# EAGLE board uvmeter (EAGLE 7.3.0)
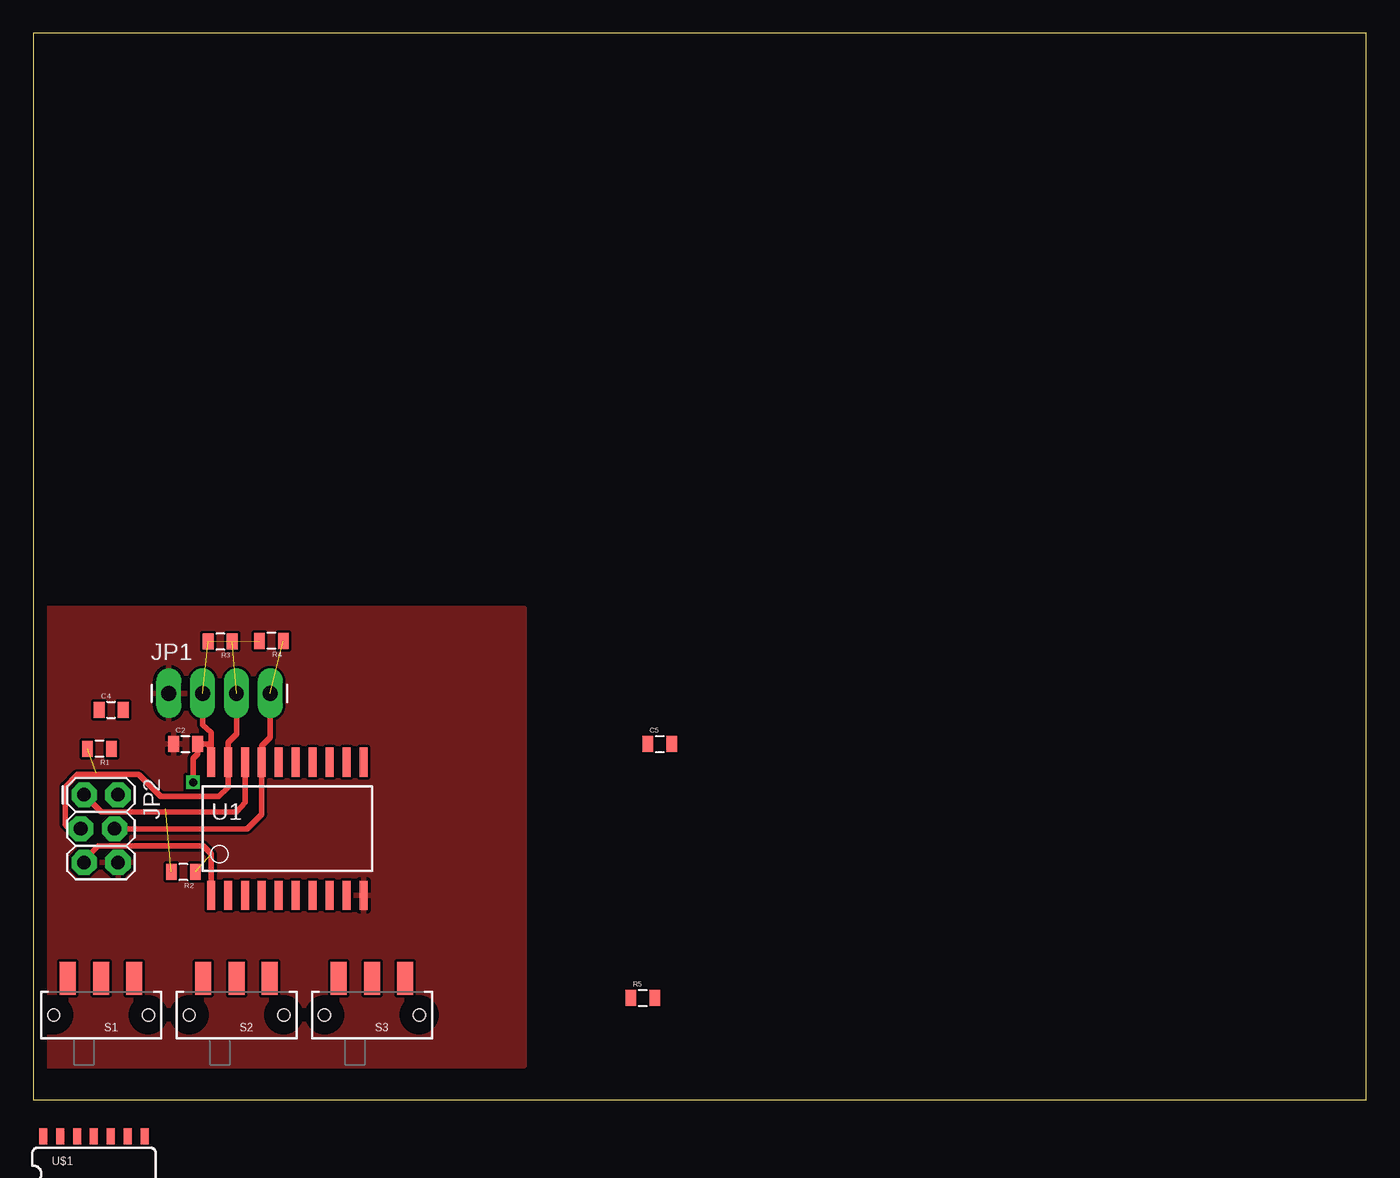
[diagram p0: board, top side]
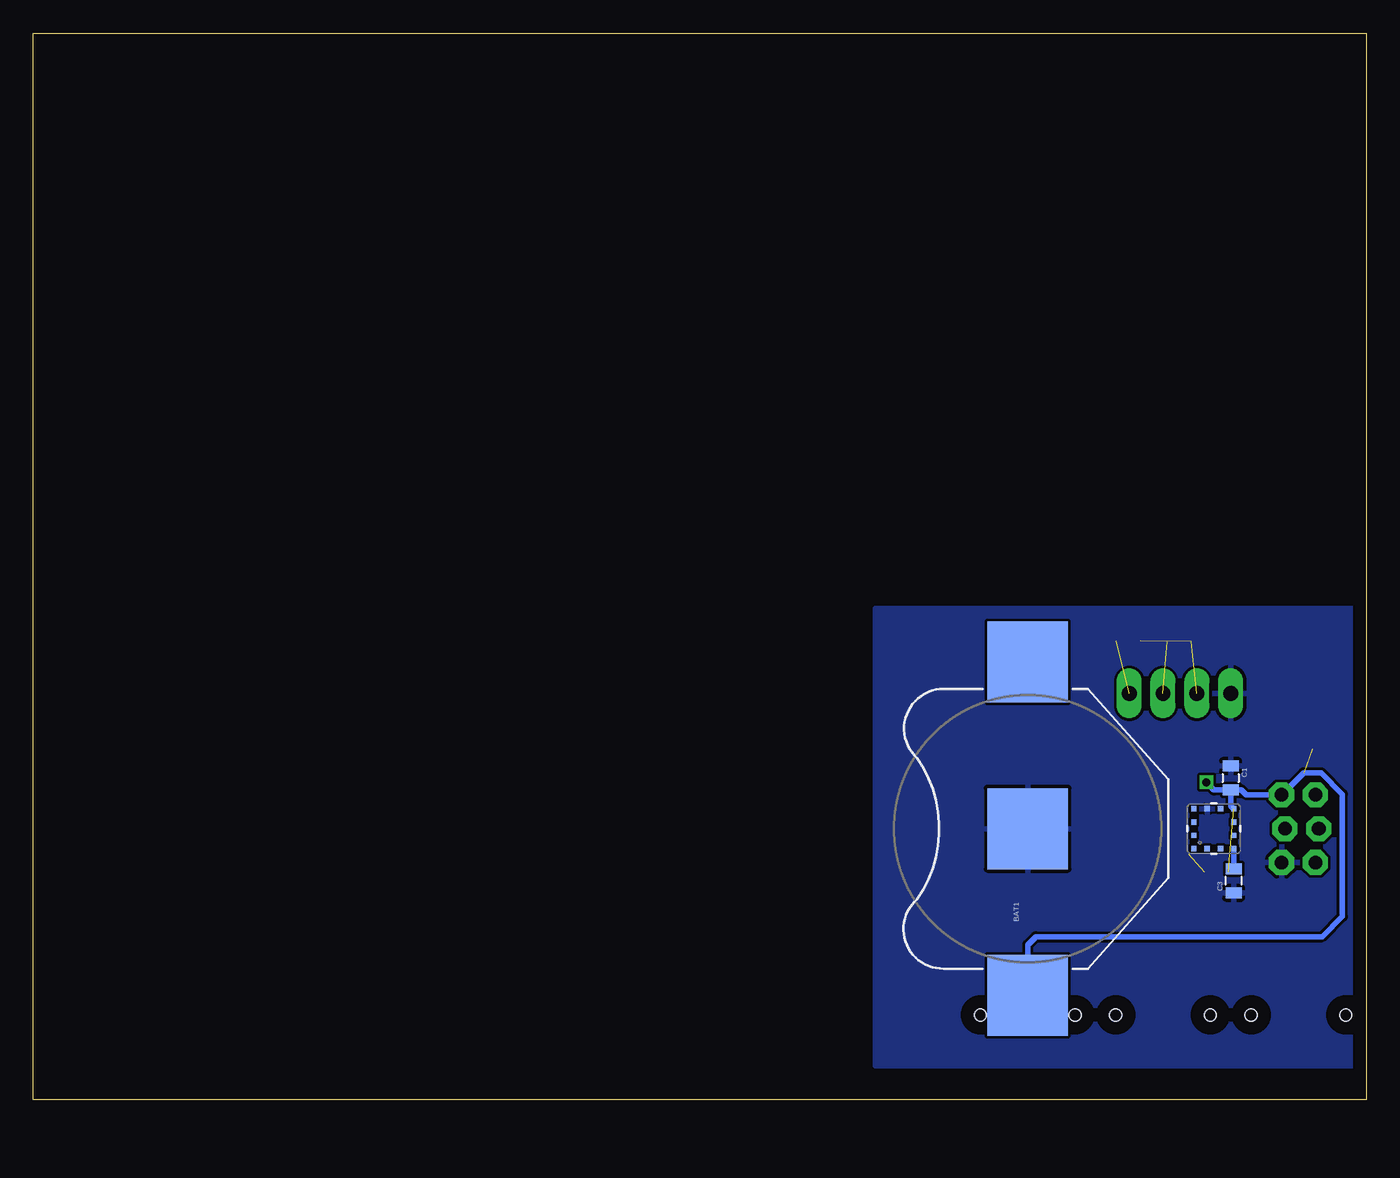
[diagram p1: board, bottom side, seen from below]

Size 100 x 80 mm. Coordinates in mm from the lower left corner, seen from the top.
Outline: 0,0 100,0 100,80 0,80 0,0
Copper layers (1*16): Top 0.035mm / dielectric 1.5mm / Bottom 0.035mm
Design rules "default": minimum track width 10mil, minimum drill 24mil, track to track 8mil, track to pad 8mil, pad to pad 8mil, via to via 8mil, smd to smd 8mil, copper to edge 40mil, drill to drill 8mil, minimum pad ring 10mil, minimum via ring 8mil, stop-mask expansion 4mil, vias tented up to drill 0mil, thermal gap 10mil

## Footprints (pad centres in the part's own frame; a part is rotated, then mirrored left to right if it is on the bottom)
BATTCON_20MM = smd 6.07 x 6.07: 1 -12.5,0; 2 0,0; 3 12.5,0
0805 = smd 0.8 x 1.2: 1 -0.9,0; 2 0.9,0
1X04_LONGPADS = drill 1.118 pad 1.88 long: 1 0,0; 2 2.54,0; 3 5.08,0; 4 7.62,0
2X3_LOCK = drill 1.016 pad 1.88 octagon: 1 0,0; 2 0,2.54; 3 2.54,-0.254; 4 2.54,2.286; 5 5.08,0; 6 5.08,2.54
SWITCH-SPDT-SMD = smd 1.2 x 2.5: 1 -2.5,-2.75; 2 0,-2.75; 3 2.5,-2.75 | hole 0.9: -3.55,0; 3.55,0
SOP20W = smd 0.6 x 2.2: 1 -5.715,-5; 2 -4.445,-5; 3 -3.175,-5; 4 -1.905,-5; 5 -0.635,-5; 6 0.635,-5; 7 1.905,-5; 8 3.175,-5; 9 4.445,-5; 10 5.715,-5; 11 5.715,5; 12 4.445,5; 13 3.175,5; 14 1.905,5; 15 0.635,5; 16 -0.635,5; 17 -1.905,5; 18 -3.175,5; 19 -4.445,5; 20 -5.715,5
ML8511 = smd 0.4 x 0.4: 1 -1.5,-1.5; 2 -1.5,-0.5; 3 -1.5,0.5; 4 -1.5,1.5; 5 -0.5,1.5; 6 0.5,1.5; 7 1.5,1.5; 8 1.5,0.5; 9 1.5,-0.5; 10 1.5,-1.5; 11 0.5,-1.5; 12 -0.5,-1.5
SO14 = smd 0.6 x 1.2: 1 -3.81,-2.8; 2 -2.54,-2.8; 3 -1.27,-2.8; 4 0,-2.8; 5 1.27,-2.8; 6 2.54,-2.8; 7 3.81,-2.8; 8 3.81,2.8; 9 2.54,2.8; 10 1.27,2.8; 11 0,2.8; 12 -1.27,2.8; 13 -2.54,2.8; 14 -3.81,2.8

## Placement (x,y rotation side)
BAT1  [BATTCON_20MM]  25.4,20.32 90 bottom
C1  [0805]  10.16,24.13 270 bottom
C2  [0805]  11.43,26.67 0 top
C3  [0805]  9.93,16.41 90 bottom
C4  [0805]  5.84,29.24 0 top
C5  [0805]  46.99,26.67 0 top
JP1  [1X04_LONGPADS]  10.16,30.48 0 top
JP2  AVR_SPI_PRG_62X3_LOCK  [2X3_LOCK]  3.81,22.86 270 top
R1  [0805]  4.95,26.31 180 top
R2  [0805]  11.25,17.07 180 top
R3  [0805]  14.02,34.37 180 top
R4  [0805]  17.86,34.42 180 top
R5  [0805]  45.72,7.62 0 top
S1  [SWITCH-SPDT-SMD]  5.08,6.35 180 top
S2  [SWITCH-SPDT-SMD]  15.24,6.35 180 top
S3  [SWITCH-SPDT-SMD]  25.4,6.35 180 top
U1  ATTINY2313A  [SOP20W]  19.05,20.32 0 top
U2  ML8511-UV-SENSORSMD  [ML8511]  11.43,20.32 0 bottom
U$1  ATTINY84  [SO14]  4.55,-5.56 0 top

## Library data of the parts
BAT1 S1-S3 = SparkFun-Electromechanical
C1-C5 = SparkFun-Capacitors
JP1 JP2 = SparkFun-Connectors
R1-R5 = SparkFun-Resistors
U1 = SparkFun-DigitalIC; PROD_ID: IC-11305
U2 = SparkFun-Sensors; PROD_ID: IC-11927
U$1 = SparkFun-DigitalIC; PROD_ID: IC-11285

## Nets
!RESET: JP2.5 R2.1 U1.1
D10: U1.13
D11: U1.14
D12: U1.15
D13: U1.16
EN: R1.1
GND: BAT1.2 C1.1 C2.1 C3.1 JP1.1 JP2.6 U1.10 U2.5
MISO: JP2.1 U1.18
MOSI: JP1.4 JP2.4 R4.1 U1.17
N$5: U2.8
N$6: U2.4
N$18: S1.2
N$19: S2.2
N$20: S3.2
N$21: S1.1
N$22: S1.3
N$23: S2.1
N$24: S2.3
N$25: S3.1
N$26: S3.3
RX: U1.2
SCK: JP1.3 JP2.3 R3.1 U1.19
TR: C3.2 U2.10
TX: U1.3
VCC: BAT1.1 C1.2 C2.2 JP1.2 JP2.2 R1.2 R2.2 R3.2 R4.2 U1.20 U2.7

## Tracks (layer width: path | path; a pad name or v marks a point on that pad's centre or on a via)
!RESET  (1 unrouted)
  Top 0.406: JP2.5 3.81,18.01 4.85,19.05 12.72,19.05 13.36,18.41 13.36,15.35 U1.1
GND
  pour Top: 0,36.83 36.83,36.83 36.83,2.54 0,2.54
  pour Bottom: 0,36.83 36.83,36.83 36.83,2.54 0,2.54
MISO
  Top 0.406: U1.18 15.88,22.28 15.27,21.59 5.08,21.59 JP2.1
MOSI  (1 unrouted)
  Top 0.406: JP1.4 17.78,27.18 17.14,26.54 U1.17 17.14,21.41 16.05,20.32 JP2.4
SCK  (1 unrouted)
  Top 0.406: JP1.3 15.24,27.43 14.61,26.8 U1.19 14.61,23.42 13.92,22.73 9.55,22.73 7.9,24.38 3.3,24.38 2.39,23.47 2.39,20.65 2.72,20.32 JP2.3
TR
  Bottom 0.406: U2.10 9.93,17.39 C3.2
VCC  (via drill 0.6)  (4 unrouted)
  Top 0.406: JP1.2 12.7,28.12 13.34,27.53 13.34,26.39 | 13.34,26.39 U1.20 | 13.34,26.39 13.06,26.67 C2.2 12.32,26.66 12.32,25.93 11.99,25.6 v11.99,23.8
  Bottom 0.406: C1.2 10.16,22.05 U2.7 | C1.2 10.15,23.24 9.37,23.24 8.99,22.86 JP2.2 4.7,24.51 3.38,24.51 1.78,22.91 1.78,13.74 3.3,12.22 24.79,12.22 25.4,11.61 BAT1.1 | C1.2 11.42,23.23 v11.99,23.8